# Altium PCB PCB1.PcbDoc
Units mm, origin at the board's own origin, x right, y up, seen from the top; angles counter-clockwise.
Board outline 90.42 x 81.15 mm, 2 copper layers (Top Layer, Bottom Layer); 24 components, 31 nets, 112 pads, 40 vias.
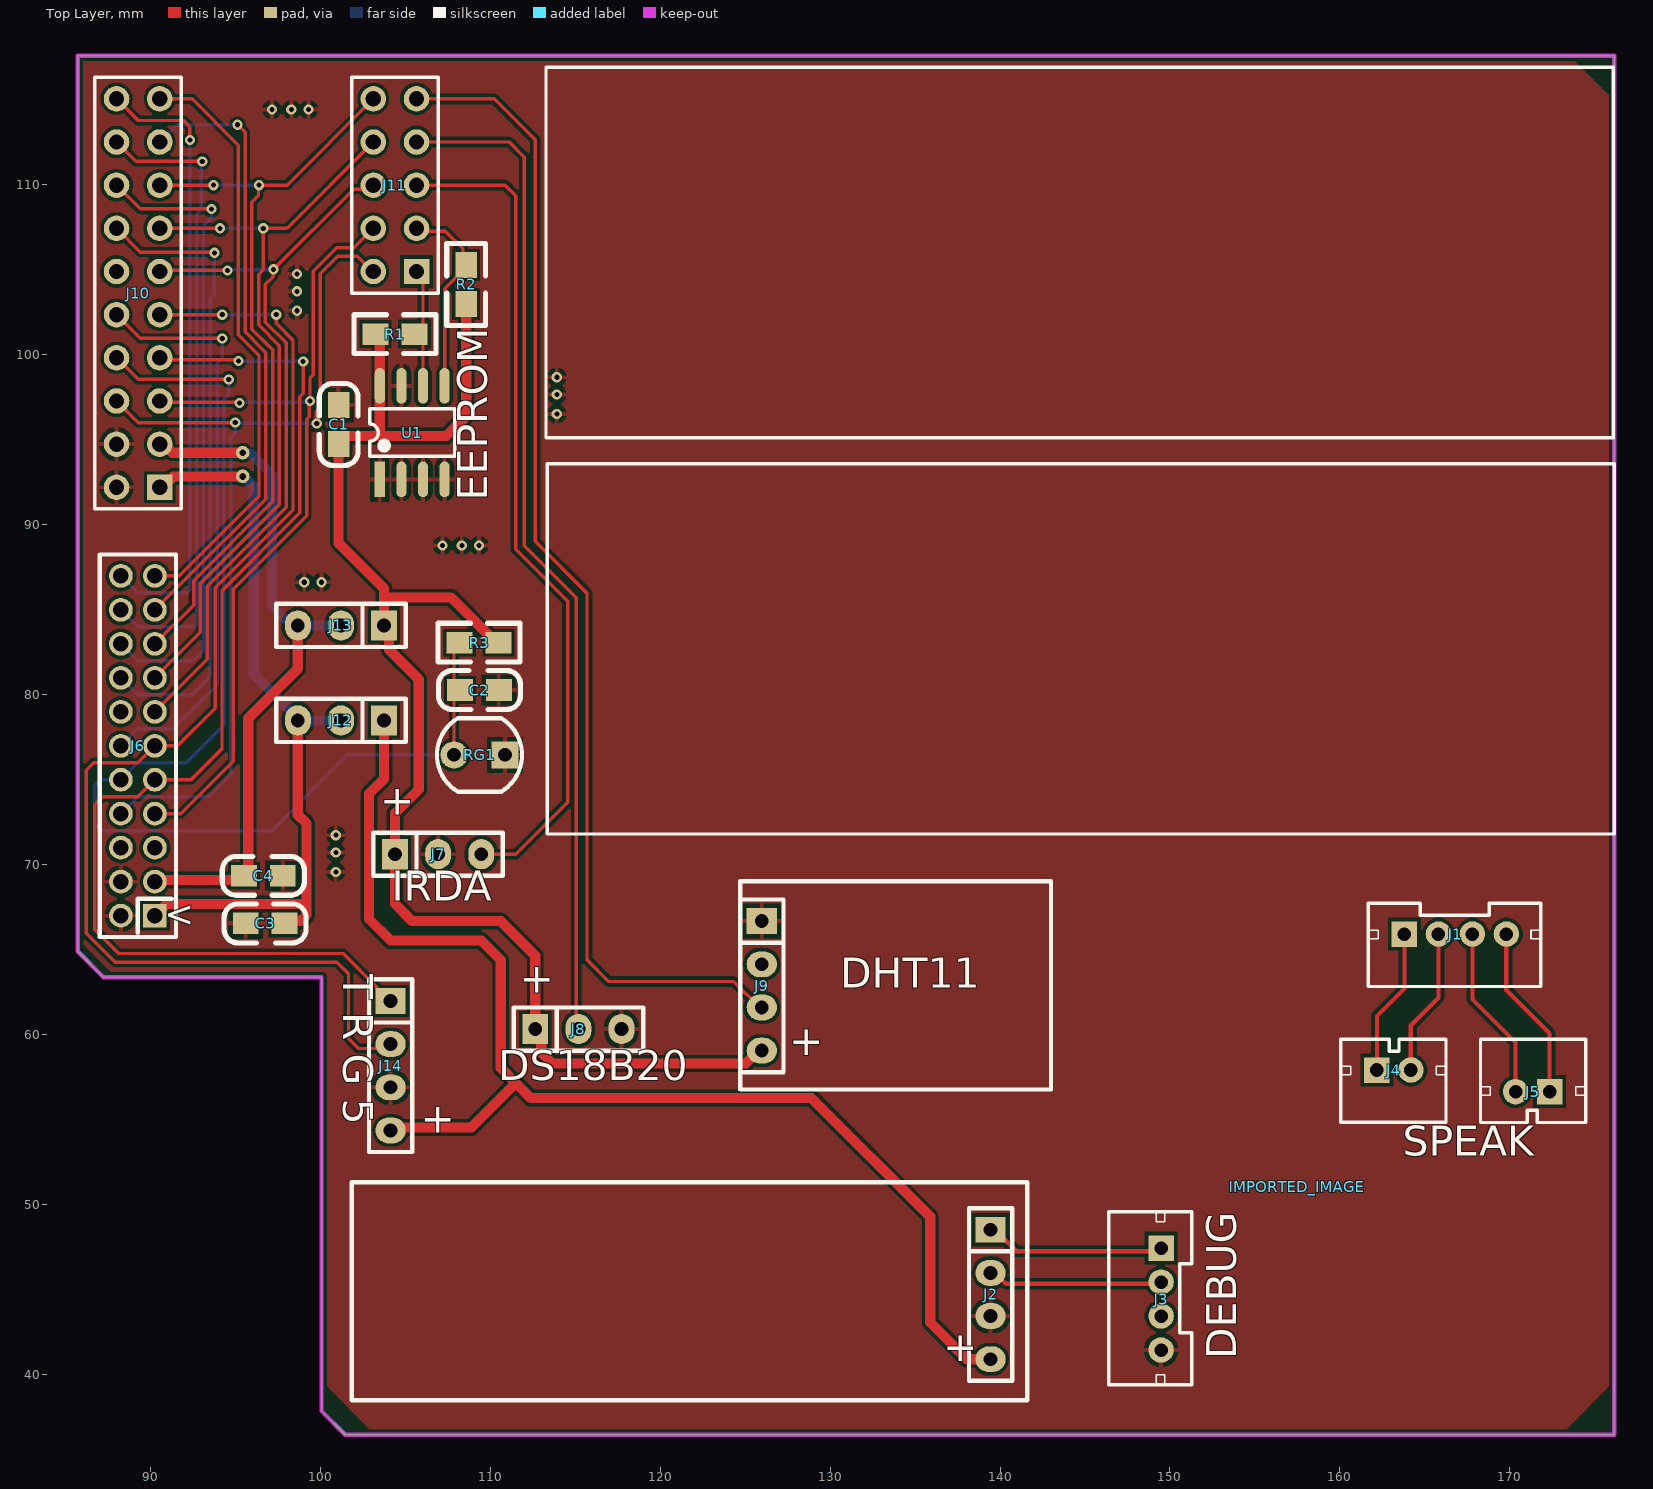
[diagram p0: Top Layer view]
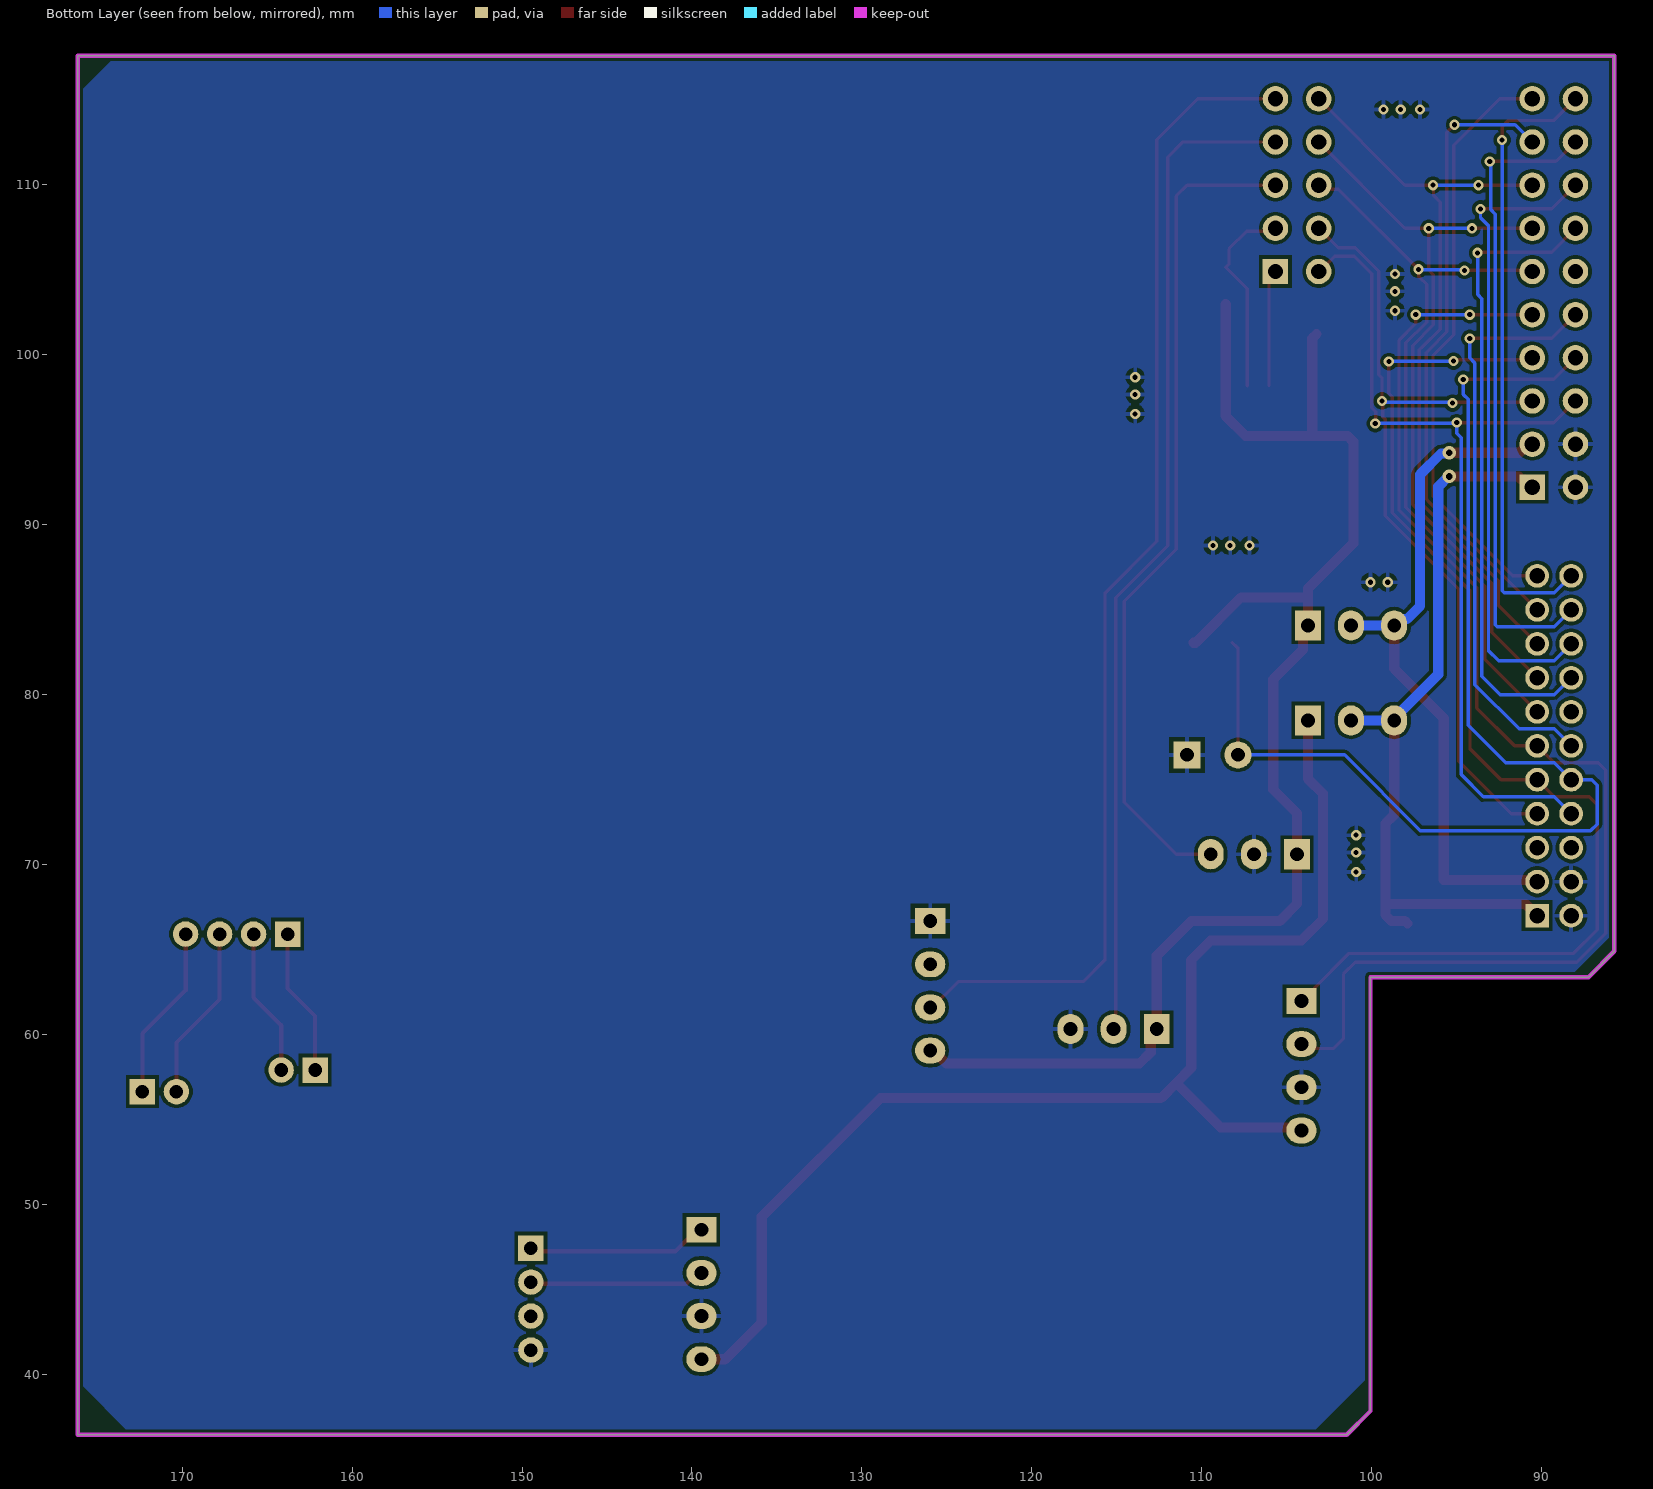
[diagram p1: Bottom Layer view, seen from below]
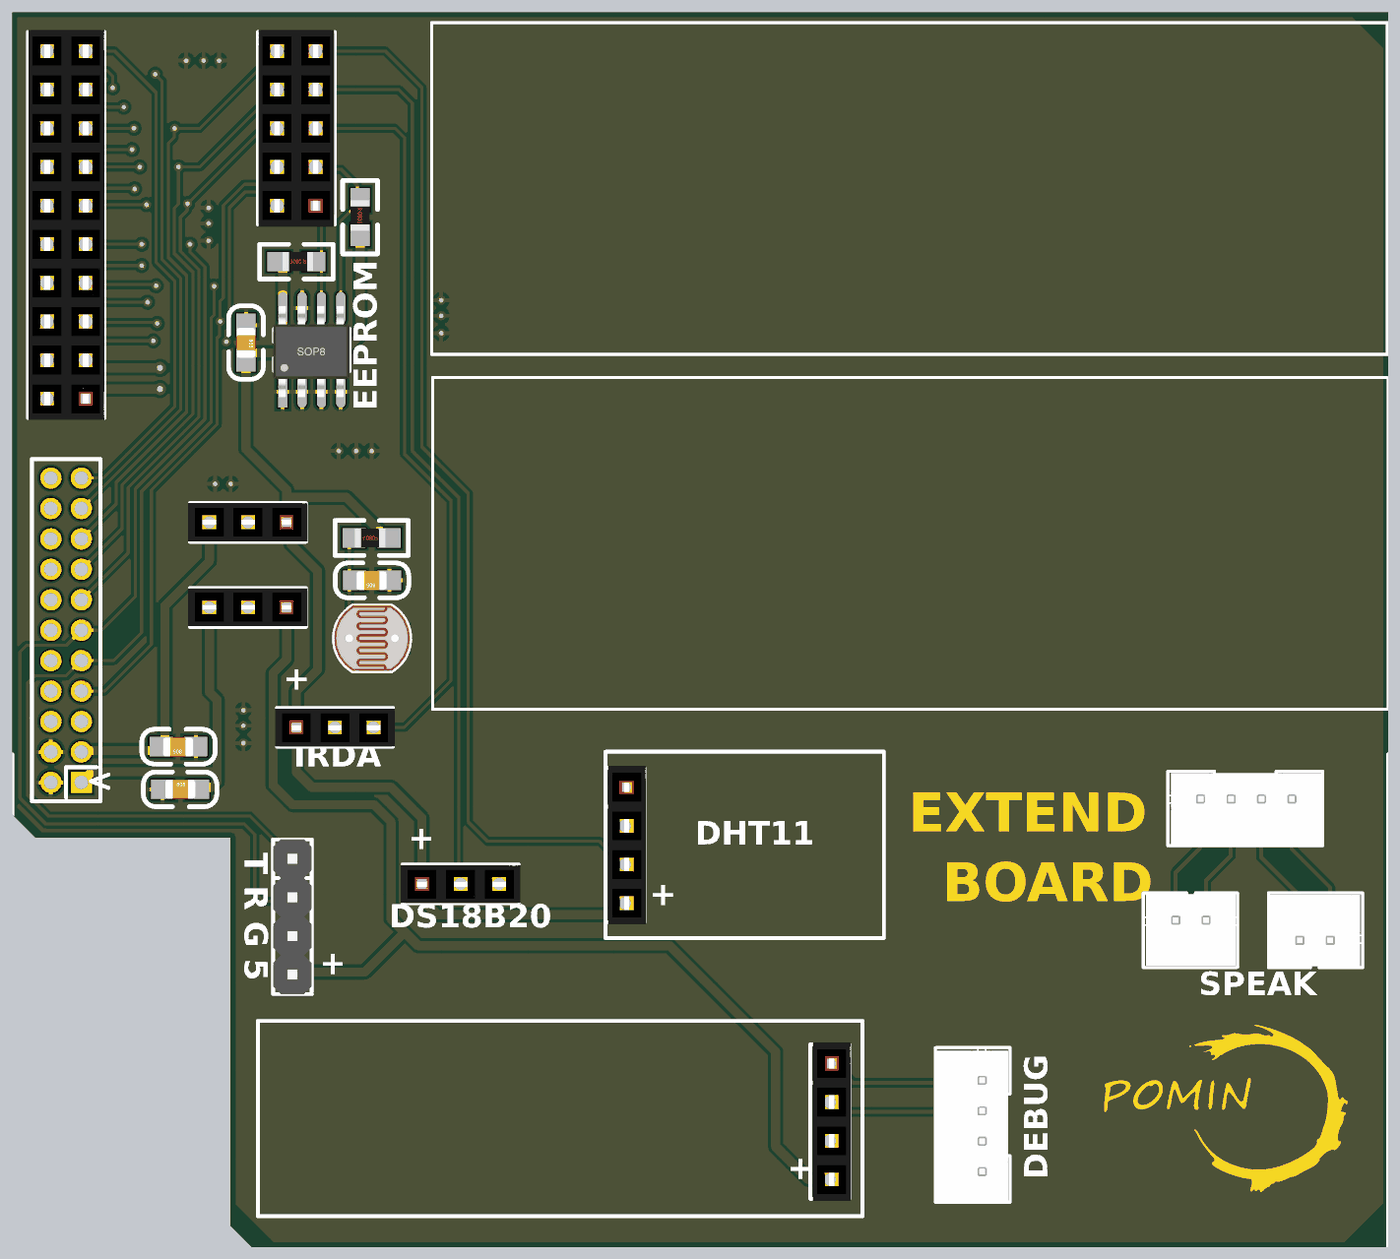
[diagram p2: 3D render of the assembled board from above, using the file's embedded part models]

## Layer stack, top to bottom
Top Solder: solder mask 0.0102, Solder Resist, Dk 3.5
Top Layer: signal copper 0.0356
Dielectric 1: dielectric 0.32, FR-4, Dk 4.8
Bottom Layer: signal copper 0.0356
Bottom Solder: solder mask 0.0102, Solder Resist, Dk 3.5

## Board outline
85.725,64.897 85.725,117.602 176.149,117.602 176.149,36.449 101.473,36.449 100.076,37.846 100.076,63.373 87.249,63.373

## Design rules (kind name [scope] priority, off if disabled: settings)
Clearance [All] p1: gap=0.2 ignorepadtopadclearanceinfootprint=FALSE
PolygonConnect [All] p1: connectstyle=Relief reliefconductorwidth=0.254 reliefentries=4 polygonreliefangle="90 Angle" airgapwidth=0.254
RoutingVias [All] p1: holewidth=0.711 width=1.27 viastyle="Through Hole" minholewidth=0.711 minwidth=1.27 maxholewidth=0.711 maxwidth=1.27
SolderMaskExpansion [All] p1: expansion=0.102 istentingtop=FALSE
Width [All] p1: maxlimit=3 minlimit=0.1 preferedwidth=0.254 minimp=50.000000 maximp=50.000000 favimp=50.000000
30 further rules are at their usual default settings.

## Components (designator, comment, footprint, x,y, rotation, side; value= is the part's Value field where it differs from the comment)
C1 "0.1u" 0805C 101.092,97.028 r270 top
C2 "0.1u" 0805C 110.49,80.264 r180 top
C3 "0.1u" 0805C 95.631,66.548 r0 top
C4 "0.1u" 0805C 97.772,69.332 r180 top
IMPORTED_IMAGE "Comment" IMPORTED_IMAGE 157.48,51.054 r0 top
J1 "PH2.0-4P" PH2.0-4P 163.799,65.913 r0 top
J2 "Female HDR1X4" Fe-HDR1X4/2.54-S 139.446,48.514 r0 top
J3 "PH2.0-4P" PH2.0-4P 149.479,47.434 r270 top
J4 "PH2.0-2P" PH2.0-2P 162.179,57.912 r0 top
J5 "PH2.0-2P" PH2.0-2P 172.339,56.642 r180 top
J6 "Pin HDR2X11" HDR-TH_22P-P2.00-V-F-R2-C11-S2.00 89.265,76.994 r270 top
J7 "Female HDR1X3" Fe-HDR1X3/2.54-S 104.394,70.612 r90 top
J8 "Female HDR1X3" Fe-HDR1X3/2.54-S 112.649,60.325 r90 top
J9 "Female HDR1X4" Fe-HDR1X4/2.54-S 125.984,66.675 r0 top
J10 "Female HDR2X10" Fe-HDR2X10/2.54-S 90.551,92.202 r90 top
J11 "Female HDR2X5" Fe-HDR2X5/2.54-S 105.664,104.902 r90 top
J12 "Female HDR1X3" Fe-HDR1X3/2.54-S 103.759,78.486 r270 top
J13 "Female HDR1X3" Fe-HDR1X3/2.54-S 103.759,84.074 r270 top
J14 "Pin HDR1X4" "Pin HDR1X4/2.54mm-S" 104.14,61.976 r0 top
R1 "10k" 0805R 105.537,101.219 r180 top
R2 "10k" 0805R 108.585,105.283 r270 top
R3 "RES" 0805R 108.204,83.058 r0 top
RG1 "Photoresistor" Photoresistor 110.871,76.454 r180 top
U1 "AT24C02" SOP8 103.505,92.671 r90 top

## Footprints (in the part's own frame and the unit in brackets; to place one, negate y for a bottom-side part, rotate by r counter-clockwise, add the part's x,y. Pads: shape width x height; smd on the part's side, far side on the other; paste and mask are expansions set on the pad)
0805C [mil]
  rect 60x50 smd: 1(-0.71,-0.4) 2(89.29,-0.4)
  silkscreen extent -51,-45 139,45, body extent 6,-25 84,25, height 31
0805R [mil]
  rect 60x50 smd: 1(0,0) 2(90,0)
  silkscreen extent -50,-45 140,45, body extent 1,-25 80,25, height 15
Fe-HDR1X3/2.54-S [mil]
  rect 70x60 hole 32: 1(0,0)
  oval 70x60 hole 32: 2(0,-100) 3(0,-200)
  silkscreen extent -50,-250 50,50, body extent -50,-255 48,55, height 335
Fe-HDR1X4/2.54-S [mil]
  rect 70x60 hole 32: 1(0,0)
  oval 70x60 hole 32: 2(0,-100) 3(0,-200) 4(0,-300)
  silkscreen extent -50,-350 50,50, body extent -44,-355 54,55, height 335
Fe-HDR2X5/2.54-S [mm] "Connector; Header; 5x2 Position"
  rect 1.5x1.5 hole 0.9: 1(0,0)
  round 1.5 hole 0.9: 2(0,2.54) 3(2.54,0) 4(2.54,2.54) 5(5.08,0) 6(5.08,2.54) 7(7.62,0) 8(7.62,2.54) 9(10.16,0) 10(10.16,2.54)
  silkscreen extent -1.27,-1.27 11.43,3.81, body extent -1.39,-1.23 11.56,3.77, height 8.5
Fe-HDR2X10/2.54-S [mm] "Connector; Header; 10x2 Position"
  rect 1.5x1.5 hole 0.9: 1(0,0)
  round 1.5 hole 0.9: 2(0,2.54) 3(2.54,0) 4(2.54,2.54) 5(5.08,0) 6(5.08,2.54) 7(7.62,0) 8(7.62,2.54) 9(10.16,0) 10(10.16,2.54) 11(12.7,0) 12(12.7,2.54) 13(15.24,0) 14(15.24,2.54) 15(17.78,0) 16(17.78,2.54) 17(20.32,0) 18(20.32,2.54) 19(22.86,0) 20(22.86,2.54)
  silkscreen extent -1.27,-1.27 24.13,3.81, body extent -1.39,-1.23 24.26,3.77, height 8.5
HDR-TH_22P-P2.00-V-F-R2-C11-S2.00 [mm]
  rect 1.4x1.4 hole 0.9: 1(10,1)
  round 1.4 hole 0.9: 2(10,-1) 3(8,1) 4(8,-1) 5(6,1) 6(6,-1) 7(4,1) 8(4,-1) 9(2,1) 10(2,-1) 11(0,1) 12(0,-1) 13(-2,1) 14(-2,-1) 15(-4,1) 16(-4,-1) 17(-6,1) 18(-6,-1) 19(-8,1) 20(-8,-1) 21(-10,1) 22(-10,-1)
  silkscreen extent -11.25,-2.25 11.25,2.25
IMPORTED_IMAGE [mm]
PH2.0-2P [mm]
  rect 1.5x1.5 hole 0.8: 1(0,0)
  round 1.5 hole 0.8: 2(2,0)
  silkscreen extent -2.13,-3.08 4.06,1.82, body extent -1.95,-2.97 3.95,1.73, height 6.01
PH2.0-4P [mm]
  rect 1.5x1.5 hole 0.8: 1(0,0)
  round 1.5 hole 0.8: 2(2,0) 3(4,0) 4(6,0)
  silkscreen extent -2.13,-3.08 8.03,1.82, body extent -1.93,-3.01 7.97,1.69, height 6.01
Photoresistor [mm]
  rect 1.6x1.6 hole 0.8: 1(0,0)
  round 1.6 hole 0.8: 2(3,0)
  silkscreen extent -1,-2.16 4,2.16, body extent -1,-2.16 4,2.14, height 1.9
"Pin HDR1X4/2.54mm-S" [mil]
  rect 70x60 hole 32: 1(0,0)
  oval 70x60 hole 32: 2(0,-100) 3(0,-200) 4(0,-300)
  silkscreen extent -50,-350 50,50, body extent -50,-350 50,50, height 336
SOP8 [mm]
  rect 2.1x0.6 smd: 1(0,0)
  oval 2.1x0.6 smd: 2(0,-1.27) 3(0,-2.54) 4(0,-3.81) 5(5.5,-3.81) 6(5.5,-2.54) 7(5.5,-1.27) 8(5.5,0)
  silkscreen extent 1.35,-4.41 4.15,0.6, body extent -0.36,-4.37 5.64,0.63, height 1.9

## Part data
C1 C2 C3 C4: library part CAP, "无极性电容"
R1 R2: library part RES
RG1: "光敏电阻"

## Via types
v1: diameter 0.6, hole 0.3, Top Layer to Bottom Layer, tented both sides, 38 vias
v2: diameter 0.8, hole 0.4, Top Layer to Bottom Layer, tented both sides, 2 vias

## Nets (pads, with @x,y where several pads share a name; then routed paths per layer and width w, separated by ;. In a path a pad name is that pad's centre, name@x,y a point inside that pad or via, vN(x,y) a via of type N, cw(c..) or ccw(c..) an arc to the next point about the centre after c; other vN are vias at no path point)
+3.3: C1.2 J7.1 J8.1 J9.4 J13.1 R1.2 R2.2 R3.2 U1.8 | length 87.3
  Top Layer w0.6: R1.2 103.505,100.965 U1.8 103.505,95.222 ; R2.2 108.585,96.393 107.414,95.222 103.505,95.222 ; R3.2 110.363,83.058 107.696,85.725 103.759,85.725 ; J9.4 125.806,59.055 125.044,58.293 113.665,58.293 113.003,58.955 113.003,59.971 J8.1 112.649,64.643 110.617,66.675 105.41,66.675 104.394,67.691 J7.1 104.394,73.025 105.791,74.422 105.791,80.899 104.049,82.641 104.049,83.784 J13.1 103.759,85.725 ; 103.505,95.222 101.417,95.222 101.082,94.887 101.082,88.91 103.759,86.233 103.759,85.725
"+3.3 IN": C4.2 J6.3 J10.3 J13.2 J13.3 | length 41.4
  Top Layer w0.6: J6.3 90.359,69.088 95.758,69.088 95.758,78.613 98.679,81.534 J13.3 ; J10.3 90.795,94.742 91.303,94.234 v2(95.433,94.234)
  Bottom Layer w0.6: v2(95.433,94.234) 95.471,94.196 95.923,94.196 97.155,92.964 97.155,85.217 97.918,84.454 98.299,84.454 J13.3 J13.2
+5: J2.4 J12.1 J14.4 | length 75.2
  Top Layer w0.6: J12.1 103.759,75.057 102.87,74.168 102.87,66.802 104.14,65.532 109.474,65.532 110.617,64.389 110.617,58.039 111.506,57.15 ; J14.4 104.317,54.533 108.889,54.533 111.506,57.15 ; J2.4 138.049,40.894 135.89,43.053 135.89,49.276 128.905,56.261 112.395,56.261 111.506,57.15
"+5 IN": C3.2 J6.1 J10.1 J12.2 J12.3 | length 45.8
  Top Layer w0.6: J6.1 90.962,67.691 99.179,67.691 99.187,67.699 ; J10.1 91.001,92.652 91.166,92.652 91.352,92.838 95.426,92.838 v2(95.433,92.845) ; C3.2 98.036,66.675 98.163,66.675 98.836,66.675 99.187,67.026 99.187,67.699 ; J12.3 98.679,72.934 99.187,72.426 99.187,67.699
  Bottom Layer w0.6: v2(95.433,92.845) 95.485,92.845 96.091,92.239 96.091,81.201 98.679,78.613 J12.3 J12.2
ANA0: C2.2 J6.10 J10.8 R3.1 RG1.2 | length 68.8
  Top Layer w0.2: J10.8 89.281,98.552 v1(94.615,98.552) ; RG1.2 107.871,82.725 R3.1
  Bottom Layer w0.2: v1(94.615,98.552) 94.615,97.663 94.329,97.377 94.329,78.2 92.123,75.994 89.265,75.994 J6.10 87.059,74.994 86.741,74.676 86.741,72.38 87.127,71.994 97.14,71.994 101.6,76.454 RG1.2
ANA1: J6.12 J10.10 | length 34.5
  Top Layer w0.2: J10.10 89.408,100.965 v1(94.234,100.965)
  Bottom Layer w0.2: J6.12 89.265,77.994 91.329,77.994 93.929,80.594 93.929,99.517 94.234,99.822 v1(94.234,100.965)
DHT11_DATA: J9.3 J11.9 | length 69
  Top Layer w0.2: J11.9 110.236,115.062 112.649,112.649 112.649,89.027 115.697,85.979 115.697,64.389 116.967,63.119 124.333,63.119 125.857,61.595 J9.3
DS18B20_DATA: J8.2 J11.7 | length 59.3
  Top Layer w0.2: J11.7 111.125,112.522 112.014,111.633 112.014,88.764 115.062,85.716 115.062,60.452 J8.2
GND: C1.1 C2.1 C3.1 C4.1 J2.3 J3.4 J6.2 J6.4 J7.2 J8.3 J9.1 J10.2 J10.4 J14.3 RG1.1 U1.1 U1.2 U1.3 U1.4 U1.7
  other v1: 100.915,69.573 100.915,70.716 100.915,71.732 99.06,86.614 100.076,86.614 107.188,88.773 108.331,88.773 109.347,88.773 113.919,96.52 113.919,97.663 113.919,98.679 98.629,102.593 98.629,103.736 98.629,104.752 97.155,114.427 98.298,114.427 99.314,114.427
"GPIOA 5": J6.17 J10.15 J11.10 | length 45.2
  Top Layer w0.2: J6.17 92.545,85.274 92.545,86.708 97.033,91.196 97.193,91.356 97.193,100.292 97.014,100.471 95.974,101.511 95.974,108.99 96.366,109.382 96.366,109.955 v1(96.393,109.982) 98.044,109.982 J11.10 ; J10.15 v1(93.726,109.982)
  Bottom Layer w0.2: v1(93.726,109.982) v1(96.393,109.982)
"GPIOA 13": J6.15 J10.13 J11.8 | length 44.8
  Top Layer w0.2: J6.15 92.945,83.674 92.945,86.543 97.593,91.191 97.593,100.539 96.374,101.758 96.374,104.722 96.647,104.995 v1(96.647,107.442) 98.044,107.442 J11.8 ; J10.13 v1(94.107,107.442)
  Bottom Layer w0.2: v1(94.107,107.442) v1(96.647,107.442)
"GPIOC 3": J6.16 J10.14 | length 37.5
  Top Layer w0.2: J10.14 89.408,106.045 93.726,106.045 v1(93.769,106.002)
  Bottom Layer w0.2: J6.16 89.265,79.994 92.44,79.994 93.529,81.083 93.529,103.308 93.769,103.548 v1(93.769,106.002)
"GPIOD 8": J6.13 J10.11 J11.6 | length 44.6
  Top Layer w0.2: J6.13 93.345,82.074 93.345,86.377 97.993,91.025 97.993,100.704 96.774,101.923 96.774,104.14 97.231,104.597 97.231,105.013 v1(97.247,105.029) 101.966,109.748 102.89,109.748 J11.6 ; J10.11 90.614,104.965 v1(94.549,104.965)
  Bottom Layer w0.2: v1(94.549,104.965) 94.58,104.997 97.215,104.997 v1(97.247,105.029)
"I2C2 SCL": J6.8 J10.6 J11.2 | length 53.4
  Top Layer w0.2: J10.6 89.281,96.012 v1(94.996,96.012) ; v1(99.793,95.95) 99.756,95.987 99.756,96.65 99.993,96.887 99.993,104.761 101.023,105.791 102.186,105.791 103.075,104.902 J11.2
  Bottom Layer w0.2: J6.8 89.265,73.994 93.425,73.994 94.733,75.302 94.733,95.114 94.996,95.377 v1(94.996,96.012) 95.027,95.981 99.762,95.981 v1(99.793,95.95)
"I2C2 SDA": J6.7 J10.5 J11.4 | length 50.2
  Top Layer w0.2: J6.7 91.79,72.994 94.869,76.073 94.869,86.196 99.193,90.52 99.193,96.199 99.356,96.362 99.356,97.245 v1(99.393,97.282) 99.393,98.631 99.593,98.831 99.593,104.927 100.965,106.299 101.981,106.299 J11.4 ; J10.5 90.614,97.218 95.186,97.218 v1(95.25,97.155)
  Bottom Layer w0.2: v1(95.25,97.155) 95.313,97.218 99.329,97.218 v1(99.393,97.282)
IRDA_DATA: J7.3 J11.5 | length 49.4
  Top Layer w0.2: J11.5 110.871,109.982 111.506,109.347 111.506,88.554 114.554,85.506 114.554,73.66 111.506,70.612 J7.3
LN: J1.3 J5.2 | length 10.3
  Top Layer w0.254: J1.3 167.799,62.071 170.339,59.531 J5.2
LP: J1.4 J5.1 | length 10.3
  Top Layer w0.254: J1.4 169.799,62.611 172.339,60.071 J5.1
RN: J1.2 J4.2 | length 8.7
  Top Layer w0.254: J4.2 164.179,60.547 165.799,62.167 J1.2
RP: J1.1 J4.1 | length 8.7
  Top Layer w0.254: J4.1 162.179,61.087 163.799,62.707 J1.1
RX: J2.2 J3.2 | length 9.9
  Top Layer w0.254: J2.2@139.827,45.847 140.261,45.413 140.335,45.339 149.384,45.339 J3.2
SCL: J11.1 R1.1 U1.6 | length 6.9
  Top Layer w0.2: J11.1 106.045,104.521 U1.6
SDA: J11.3 R2.1 U1.5 | length 11.9
  Top Layer w0.2: J11.3 105.825,107.281 107.349,107.281 108.402,106.228 108.402,105.339 108.585,105.156 107.315,103.886 U1.5
"SPI5 CS0": J6.20 J10.18 | length 37.8
  Top Layer w0.2: J10.18 89.154,111.379 v1(93.056,111.379)
  Bottom Layer w0.2: J6.20 89.265,83.994 92.612,83.994 92.729,84.111 92.729,108.281 92.999,108.551 92.999,111.322 v1(93.056,111.379)
"SPI5 CS1": J6.18 J10.16 | length 37.9
  Top Layer w0.2: J10.16 89.408,108.585 v1(93.599,108.585)
  Bottom Layer w0.2: J6.18 89.265,81.994 92.535,81.994 93.129,82.588 93.129,107.607 93.599,108.077 v1(93.599,108.585)
"SPI5 MISO": J6.22 J10.20 | length 36.8
  Top Layer w0.2: J10.20 89.284,113.789 91.951,113.789 92.329,113.411 v1(92.329,112.649)
  Bottom Layer w0.2: J6.22 89.265,85.994 92.212,85.994 92.329,86.111 v1(92.329,112.649)
"SPI5 MOSI": J6.21 J10.19 | length 35
  Top Layer w0.2: J6.21 91.699,86.994 96.393,91.688 96.393,99.961 95.174,101.18 95.174,112.344 92.456,115.062 J10.19
"SPI5 SCLK": J6.19 J10.17 | length 36.9
  Top Layer w0.2: J6.19 92.145,86.874 96.633,91.362 96.793,91.522 96.793,100.126 96.614,100.305 95.574,101.345 95.574,113.087 v1(95.123,113.538)
  Bottom Layer w0.2: J10.17 91.567,113.538 v1(95.123,113.538)
TX: J2.1 J3.1 | length 10.5
  Top Layer w0.254: J2.1@139.827,48.387 140.45,47.764 140.97,47.244 J3.1@149.837,47.244
"UART8 RX": J6.11 J10.9 J14.2 | length 74.1
  Top Layer w0.2: J10.9 v1(94.234,102.362) ; v1(97.409,102.362) 97.409,101.854 98.393,100.87 98.393,90.859 93.818,86.285 93.818,79.213 91.599,76.994 J6.11 89.265,75.994 86.662,75.994 86.233,75.565 86.233,65.957 87.928,64.262 100.965,64.262 101.663,63.563 101.663,59.753 102.235,59.182 103.234,59.182 ; 103.235,59.183 103.887,59.183 J14.2
  Bottom Layer w0.2: v1(94.234,102.362) v1(97.409,102.362)
"UART8 TX": J6.9 J10.7 J14.1 | length 68.7
  Top Layer w0.2: J10.7 90.664,99.709 95.109,99.709 v1(95.185,99.633) ; v1(98.993,99.6) 98.993,97.731 98.793,97.531 98.793,90.694 94.218,86.119 94.218,76.819 92.393,74.994 J6.9 89.265,73.994 87.202,73.994 86.741,73.533 86.741,66.167 88.138,64.77 101.346,64.77 103.351,62.765 103.351,62.638 104.013,61.976 J14.1
  Bottom Layer w0.2: v1(95.185,99.633) 95.202,99.616 98.977,99.616 v1(98.993,99.6)
pads on no net: J3.3 J6.5 J6.6 J6.14 J9.2 J10.12

## Polygon pours and split planes (outlines as drawn)
GND on Top Layer "GND_L01_P000" (solid, remove dead copper, pour order 0): 85.725,117.475 173.609,117.475 175.895,115.189 175.895,39.37 172.847,36.322 103.378,36.322 100.076,39.624 100.076,61.468 98.044,63.5 87.884,63.5 85.725,65.659
GND on Bottom Layer "GND_L02_P001" (solid, remove dead copper, pour order 1): 85.915,117.665 173.799,117.665 176.085,115.379 176.085,39.56 173.037,36.512 103.569,36.512 100.266,39.814 100.266,61.658 98.234,63.691 88.075,63.691 85.915,65.849

## Keep-outs
Keep-Out Layer:
  lines w0.254: 85.725,64.897 87.249,63.373 100.076,63.373 100.076,37.846 101.473,36.449 176.149,36.449 176.149,117.602 85.725,117.602 85.725,90.805 85.725,68.834 85.725,64.897

## Silkscreen, mask and mechanical layers (free items; w line width, h text height)
Top Overlay:
  lines w0.2: 113.284,95.123 176.084,95.123 176.084,116.923 113.284,116.923 113.284,95.123 ; 113.349,71.799 176.149,71.799 176.149,93.599 113.349,93.599 113.349,71.799
  lines w0.254: 101.859,38.481 141.605,38.481 141.605,51.308 101.859,51.308 101.859,38.481 ; 124.716,56.769 143.002,56.769 143.002,69.015 124.716,69.015 124.716,56.769
  text "EEPROM" at 110.417,91.426 h3 r90
  text "+" at 103.533,72.346 h3
  text ">" at 92.583,67.66 h1.52 r180
  text "IRDA" at 104.216,67.284 h3
  text "T R G 5" at 100.756,63.534 h3 r270
  text "DHT11" at 130.586,62.17 h3
  text "+" at 111.734,61.868 h3
  text "+" at 127.609,58.185 h3
  text "DS18B20" at 110.477,56.715 h3
  text "+" at 105.911,53.643 h3
  text "SPEAK" at 163.698,52.27 h3
  text "DEBUG" at 154.496,40.899 h3 r90
  text "+" at 136.645,40.181 h3
Top Solder:
  text "EXTEND" at 144.62,62.52 h5
  text "BOARD" at 146.851,57.948 h5

## Dimensions
85.725,68.834 to 176.149,36.449 on Top Overlay